# Allegro board asq1_power.brd
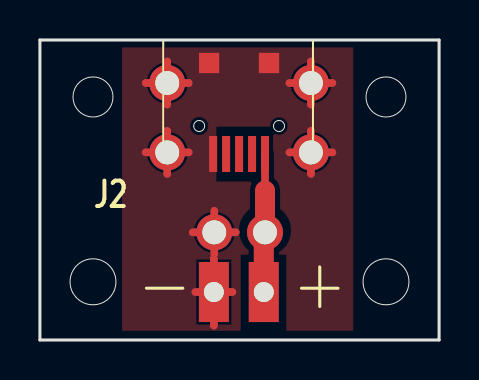
[diagram p0: board, top side]
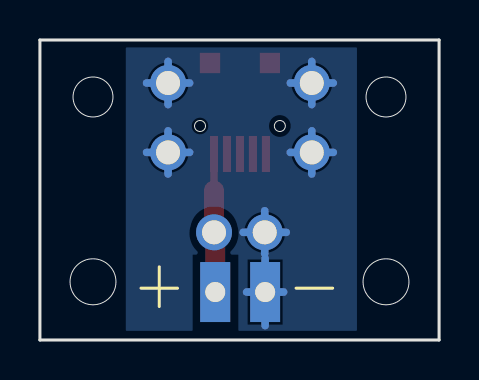
[diagram p1: board, bottom side, seen from below]

Outline 20 x 15 mm; copper layers: TOP, BOTTOM. Coordinates in mm from the lower left corner of the outline.
Outline path: circle c2.66,12.15 r1 ; circle c2.66,2.91 r1.15 ; circle c17.34,12.15 r1 ; circle c17.34,2.91 r1.15 ; 0,15 20,15 20,0 0,0 0,15

## Design rules (mm)
nets with their own width: min track width 0.381; nets +5V GND

## Placement (name value [footprint] x y rotation side)
J1  microUSB_insona  [USB_MK72]  9.98 12.85 180 top
J2  J2x1  [CON2_2M5_T]  13.72 -1.1 90 top
J3  J2x1  [CON2]  10.01 5.38 270 top

## Library data of the parts
J1 = microUSB_insona
J2 J3 = J2x1

## Footprints (pads in the part's own frame, mm; a bottom-side part is the same pattern mirrored in y, then rotated)
CON2
  round 1.8 hole 1.2: 1(0,1.27) 2(0,-1.27)
CON2_2M5_T
  rect 3x1.5 hole 1: 1(3.5,2.5) 2(3.5,5)
USB_MK72
  rect 0.4x1.8 smd: 1(-1.3,3.55) 2(-0.65,3.55) 3(0,3.55) 4(0.65,3.55) 5(1.3,3.55)
  round 1.8 hole 1.2: 6(-3.6,0) 7(3.6,0) 8(3.6,3.47) 9(-3.6,3.47)
  rect 1.016x1.016 smd: 10(-1.5,-1) 11(1.5,-1)

## Nets
+5V: J1.1(VBUS) J2.1 J3.1
GND: J1.5(GND) J1.6(G1) J1.7(G2) J1.8(G3) J1.9(G4) J1.10(G5) J1.11(G6) J2.2 J3.2

Pads without a net: J1 2 3 4

## Routing (per net, layer and track width the routed paths; a pad name or vN(x,y) marks a point on that pad's centre or on a via; arc(x,y) is an arc through that point)
+5V: length 6.9
  TOP w0.381: 11.28,7.47 J1.1
  TOP w1: 11.28,7.47 11.28,5.39 J3.1 11.22,5.32 J2.1
GND: length 53.5
  TOP w0.381: J1.8 7.46,9.38 ; J1.8 6.38,8.3 ; J1.8 6.38,10.46 ; J1.8 5.3,9.38 ; J2.2 9.64,2.4 ; J2.2 8.72,4.08 ; J2.2 8.72,0.72 ; J2.2 7.79,2.4 ; 13.58,8.3 J1.9 ; J1.9 14.66,9.38 ; J1.9 12.5,9.38 ; J1.9 13.58,10.46 ; 5.3,12.85 J1.7 ; J1.7 6.38,13.93 ; J1.7 7.46,12.85 ; J1.7 6.38,11.77 ; 7.66,5.38 J3.2 ; J3.2 8.74,6.46 ; J3.2 9.81,5.38 ; J3.2 8.74,4.31 ; 13.58,11.77 J1.6 ; J1.6 12.5,12.85 ; J1.6 14.66,12.85 ; J1.6 13.58,13.93
  BOTTOM w0.381: J1.8 7.46,9.38 ; J1.8 6.38,10.46 ; J1.8 5.3,9.38 ; J1.8 6.38,8.3 ; J2.2 9.64,2.4 ; J2.2 7.79,2.4 ; J2.2 8.72,0.72 ; J2.2 8.72,4.08 ; 8.74,4.31 J3.2 ; J3.2 9.81,5.38 ; J3.2 7.66,5.38 ; J3.2 8.74,6.46 ; 13.58,8.3 J1.9 ; J1.9 12.5,9.38 ; J1.9 13.58,10.46 ; J1.9 14.66,9.38 ; J1.7 7.46,12.85 ; J1.7 6.38,13.93 ; J1.7 5.3,12.85 ; J1.7 6.38,11.77 ; J1.6 14.66,12.85 ; J1.6 13.58,13.93 ; J1.6 13.58,11.77 ; J1.6 12.5,12.85

## Copper pours and planes (outline as drawn; the poured copper is in the pictures)
GND on TOP: 4.11,0.46 4.11,14.63 15.7,14.63 15.7,0.46 12.34,0.46 12.34,4.27 11.73,4.27 11.28,6.79 10.82,4.27 10.06,4.27 10.06,0.46 ; 2 cut-outs
GND on BOTTOM: 11.89,4.27 12.42,4.89 12.45,5.71 11.28,6.68 10.11,5.71 10.13,4.89 10.67,4.27 10.06,4.27 10.06,0.46 4.11,0.46 4.11,14.63 15.7,14.63 15.7,0.46 12.34,0.46 12.34,4.27 ; 2 cut-outs

## Text on the board
NCLEGEND-1-2: FIGURE | SIZE | 1.0 | 1.2 | DRILL CHART: TOP to BOTTOM | ALL UNITS ARE IN MILLIMETERS | PLATED | QTY | 2 | 6
